# Altium PCB Power Reg Breakout V1.PcbDoc (part 2 of 2)
Units mil, origin at the board's own origin, x right, y up, seen from the top; angles counter-clockwise.
Board outline 1959 x 2445 mil, 2 copper layers (Top Layer, Bottom Layer); 83 components, 39 nets, 230 pads, 125 vias.
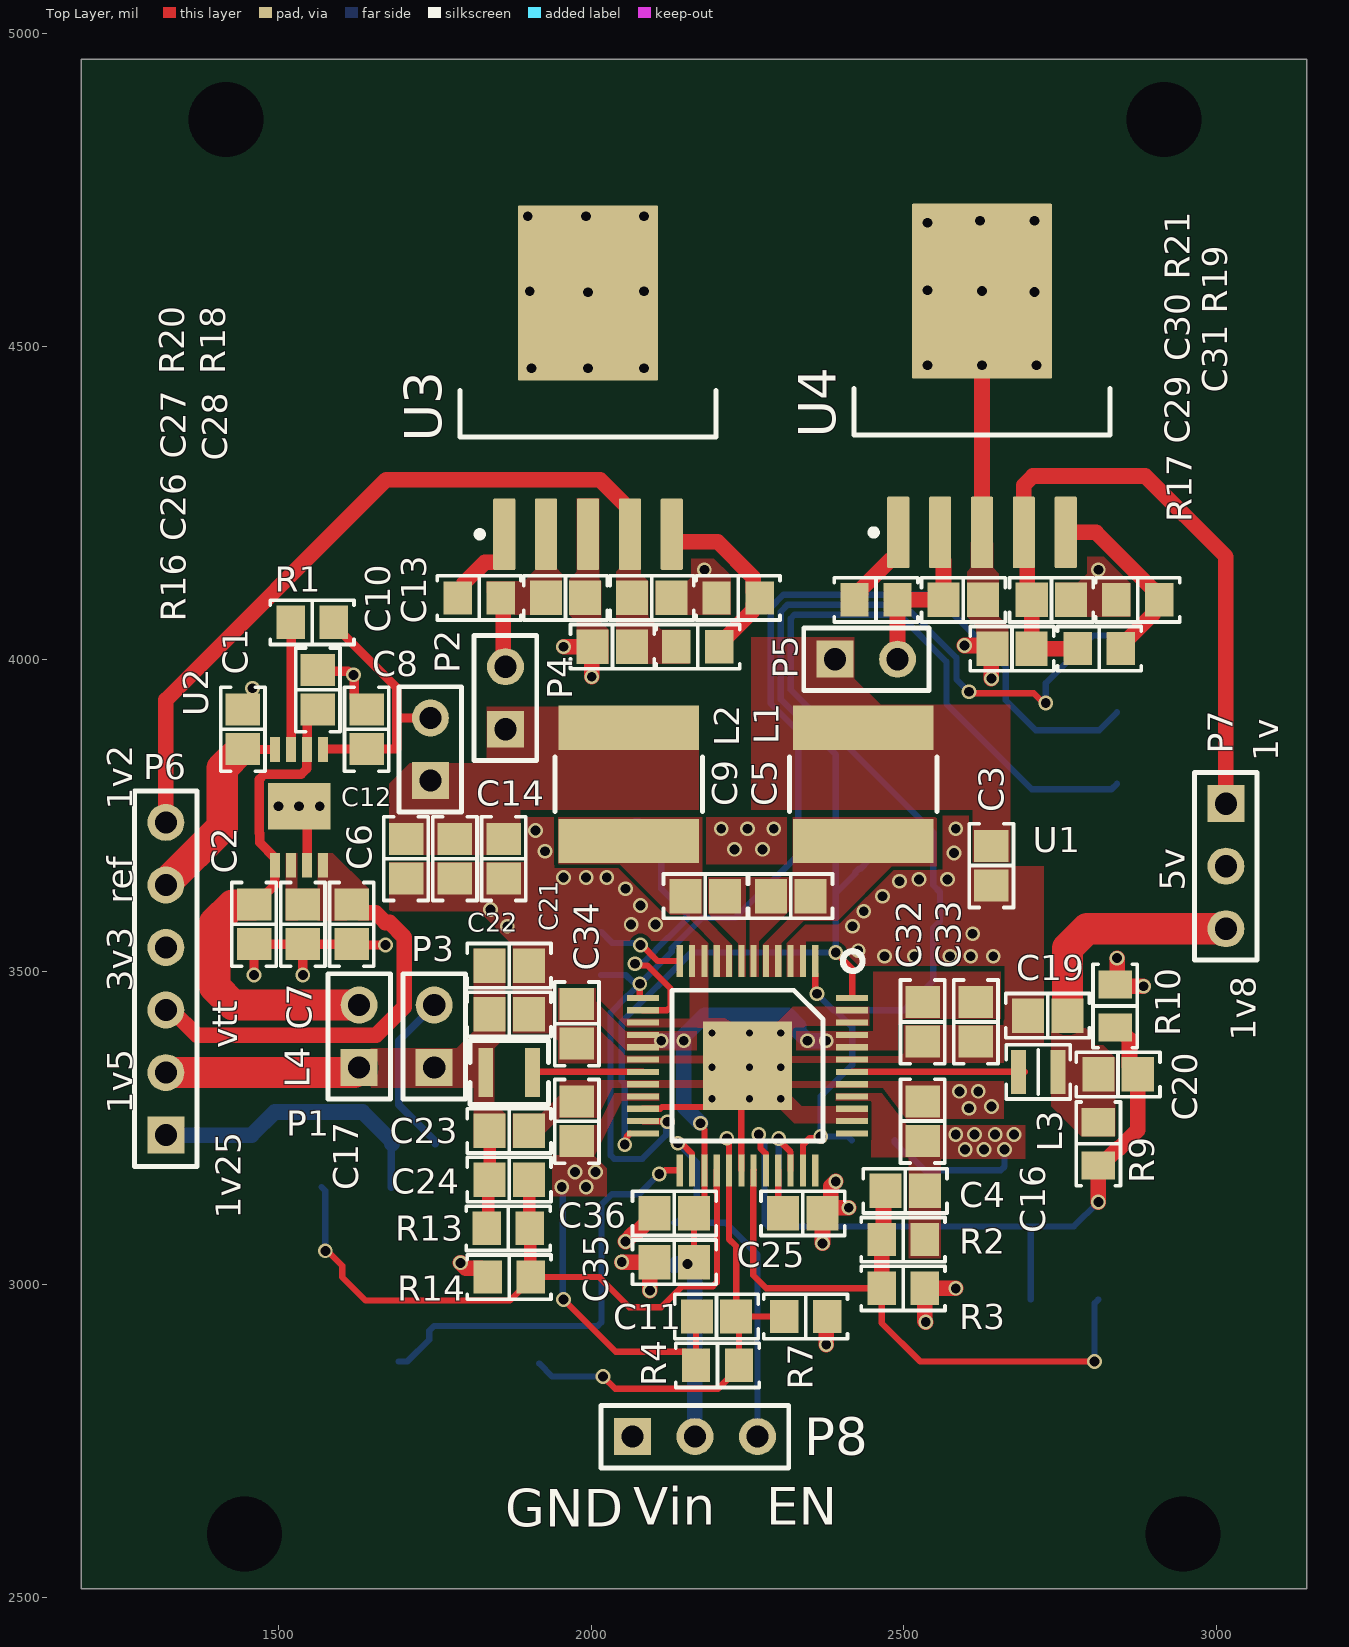
[diagram p0: Top Layer view]

## Polygon pours and split planes (outlines as drawn) (continued)
GND on Top Layer "GND_L01_P020" (solid, pour order 20): 2187,3354 1947,3354 1947,3390 1935,3402 1875,3402 1875,3543 1821,3597 1677,3597 1677,3675 1896,3675 1896,3747 1941,3747 1941,3666 2043,3666 2124,3585 2148,3585 2187,3546 2187,3426 2157,3426 2157,3549 2052,3549 2052,3426 2214,3426 2241,3411 2055,3411 2016,3450 2016,3480 1938,3480 1938,3414 2007,3414 2055,3366 2187,3366
Vin on Top Layer "VIN_L01_P019" (solid, pour order 19): 1947,3420 2010,3420 2055,3375 2169,3375 2169,3405 2055,3405 2007,3453 2007,3474 1947,3474
GND on Top Layer "GND_L01_P018" (solid, pour order 18): 2442,3258 2325,3258 2301,3282 2320.5,3301.5 2337,3285 2442,3285
GND on Top Layer "GND_L01_P017" (solid, pour order 17): 2445,3414 2343,3414 2313,3384 2289,3384 2289,3411 2322,3444 2445,3444
NetC9_2 on Top Layer "NETC9_2_L01_P015" (solid, pour order 15): 2226,3492 2226,3543 2178,3591 2178,3747 1947,3747 1947,3672 2046,3672 2127,3591 2151,3591 2196,3546 2196,3492
GND on Top Layer "GND_L01_P012" (solid, pour order 12): 2184,3672 2313,3672 2313,3747 2184,3747
+5 on Top Layer "+5_L01_P011" (solid, pour order 11): 2256,4035 2256,3759 2610,3759 2610,3675 2670,3675 2670,3927 2463,3927 2421,3969 2421,4035
GND on Top Layer "GND_L01_P010" (solid, pour order 10): 2313,3492 2343,3492 2343,3549 2397,3549 2409,3537 2409,3510 2661,3510 2661,3486 2724,3486 2724,3669 2604,3669 2604,3750 2562,3750 2562,3663 2481,3663 2397,3579 2340,3579 2313,3552
NetC5_2 on Top Layer "NETC5_2_L01_P009" (solid, pour order 9): 2274,3492 2304,3492 2304,3546 2340,3582 2394,3582 2481,3669 2553,3669 2553,3750 2550,3747 2322,3747 2322,3591 2274,3543
NetC5_1 on Top Layer "NETC5_1_L01_P008" (solid, pour order 8): 2253,3492 2253,3651 2316,3651 2316,3597 2268,3549 2268,3492
NetC9_1 on Top Layer "NETC9_1_L01_P007" (solid, pour order 7): 2235,3492 2235,3546 2187,3594 2187,3651 2241,3651 2247,3651 2247,3492
+5 on Top Layer "+5_L01_P005" (solid, pour order 5): 2391,3306 2466,3306 2505,3255 2559,3255 2559,3204 2448,3204 2448,3294 2391,3294
GND on Top Layer "GND_L01_P004" (solid, pour order 4): 2316,3325 2660,3325 2660,3265 2504,3265 2466,3315 2316,3315
GND on Top Layer "GND_L01_P003" (solid, pour order 3): 2316,3355 2660,3355 2660,3385 2724,3385 2724,3490 2660,3490 2660,3415 2500,3415 2500,3370 2495,3365 2316,3365
Vin on Top Layer "VIN_L01_P001" (solid, pour order 1): 2328,3375 2490,3375 2490,3415 2500,3425 2655,3425 2655,3500 2451,3500 2451,3405 2328,3405
+3.3 on Bottom Layer "+3.3_L02_P036" (solid, pour order 36): 1275,3504 1431,3504 1683,3756 1770,3756 1770,3834 1668,3834 1413,3579 1275,3579
+5 on Bottom Layer "+5_L02_P037" (solid, pour order 37): 2706,3708 3054,3708 3054,3633 2706,3633
GND on Bottom Layer "GND_L02_P044" (solid, pour order 44): 1272,4788 1272,2703 3066,2703 3066,4788
+5 on Bottom Layer "+5_L02_P043" (solid, pour order 43): 2361,4029 2421,4029 2421,4011 2727,3705 2727,3201 2568,3201 2568,3258 2655,3258 2655,3687 2361,3981
+3.3 on Bottom Layer "+3.3_L02_P040" (solid, pour order 40): 1710,3837 1710,3756 1896,3570 1896,3132 2019,3132 2019,3144 2019,3207 1977,3249 1977,3606 1779,3837
+3.3 on Bottom Layer "+3.3_L02_P042" (solid, pour order 42): 2004,3570 1965,3570 1950,3561 2004,3561

## Silkscreen, mask and mechanical layers (free items; w line width, h text height)
Top Overlay:
  text "1v" at 3099,3837 h40 r90
  text "1v2" at 1266,3759 h40 r90
  text "5v" at 2949,3630 h40 r90
  text "ref" at 1266,3609 h40 r90
  text "3v3" at 1266,3468 h40 r90
  text "1v8" at 3063,3390 h40 r90
  text "vtt" at 1434,3378 h40 r90
  text "1v5" at 1266,3273 h40 r90
  text "1v25" at 1440,3105 h40 r90
  text "Vin" at 2067,2616 h60
  text "EN" at 2280,2616 h60
  text "GND" at 1863,2613 h60
Bottom Overlay:
  text "Power Delivery V1" at 2669,4829.99 h60
  text "E.L.C" at 1397,3032 h60 r90
  text "2021/06/27" at 2447,2590 h60